# Altium PCB B45120517E(origin).PcbDoc (part 1 of 2)
Units mm, origin at the board's own origin, x right, y up, seen from the top; angles counter-clockwise.
Board outline 101.6 x 152.4 mm, 2 copper layers (Top Layer, Bottom Layer); 156 components, 88 nets, 425 pads, 670 vias.
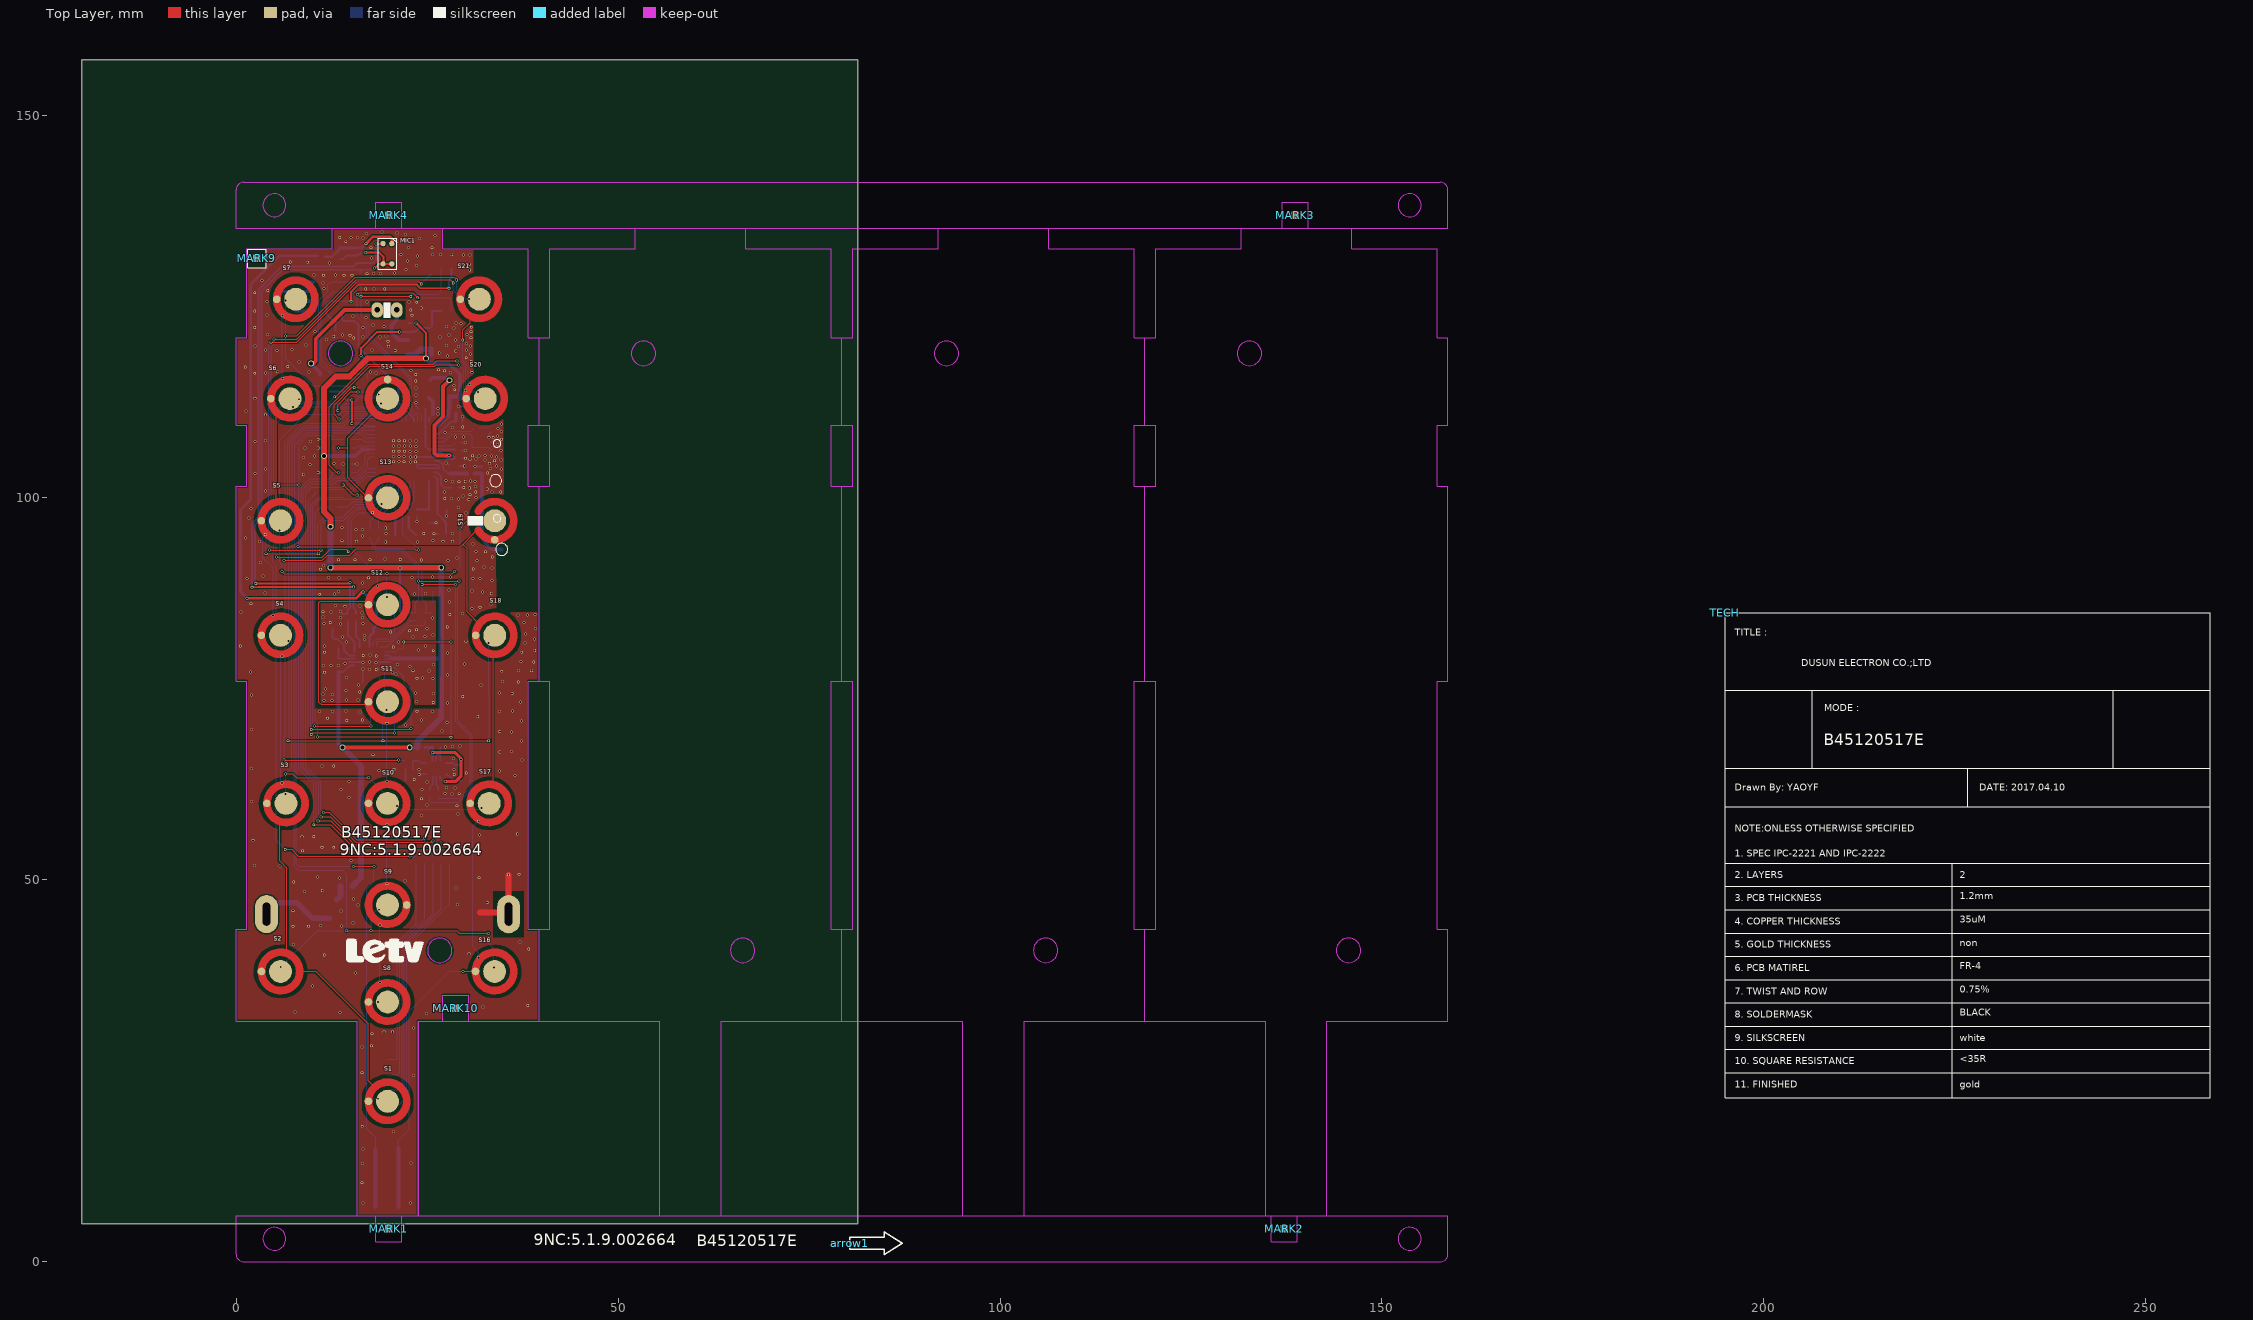
[diagram p0: Top Layer view]
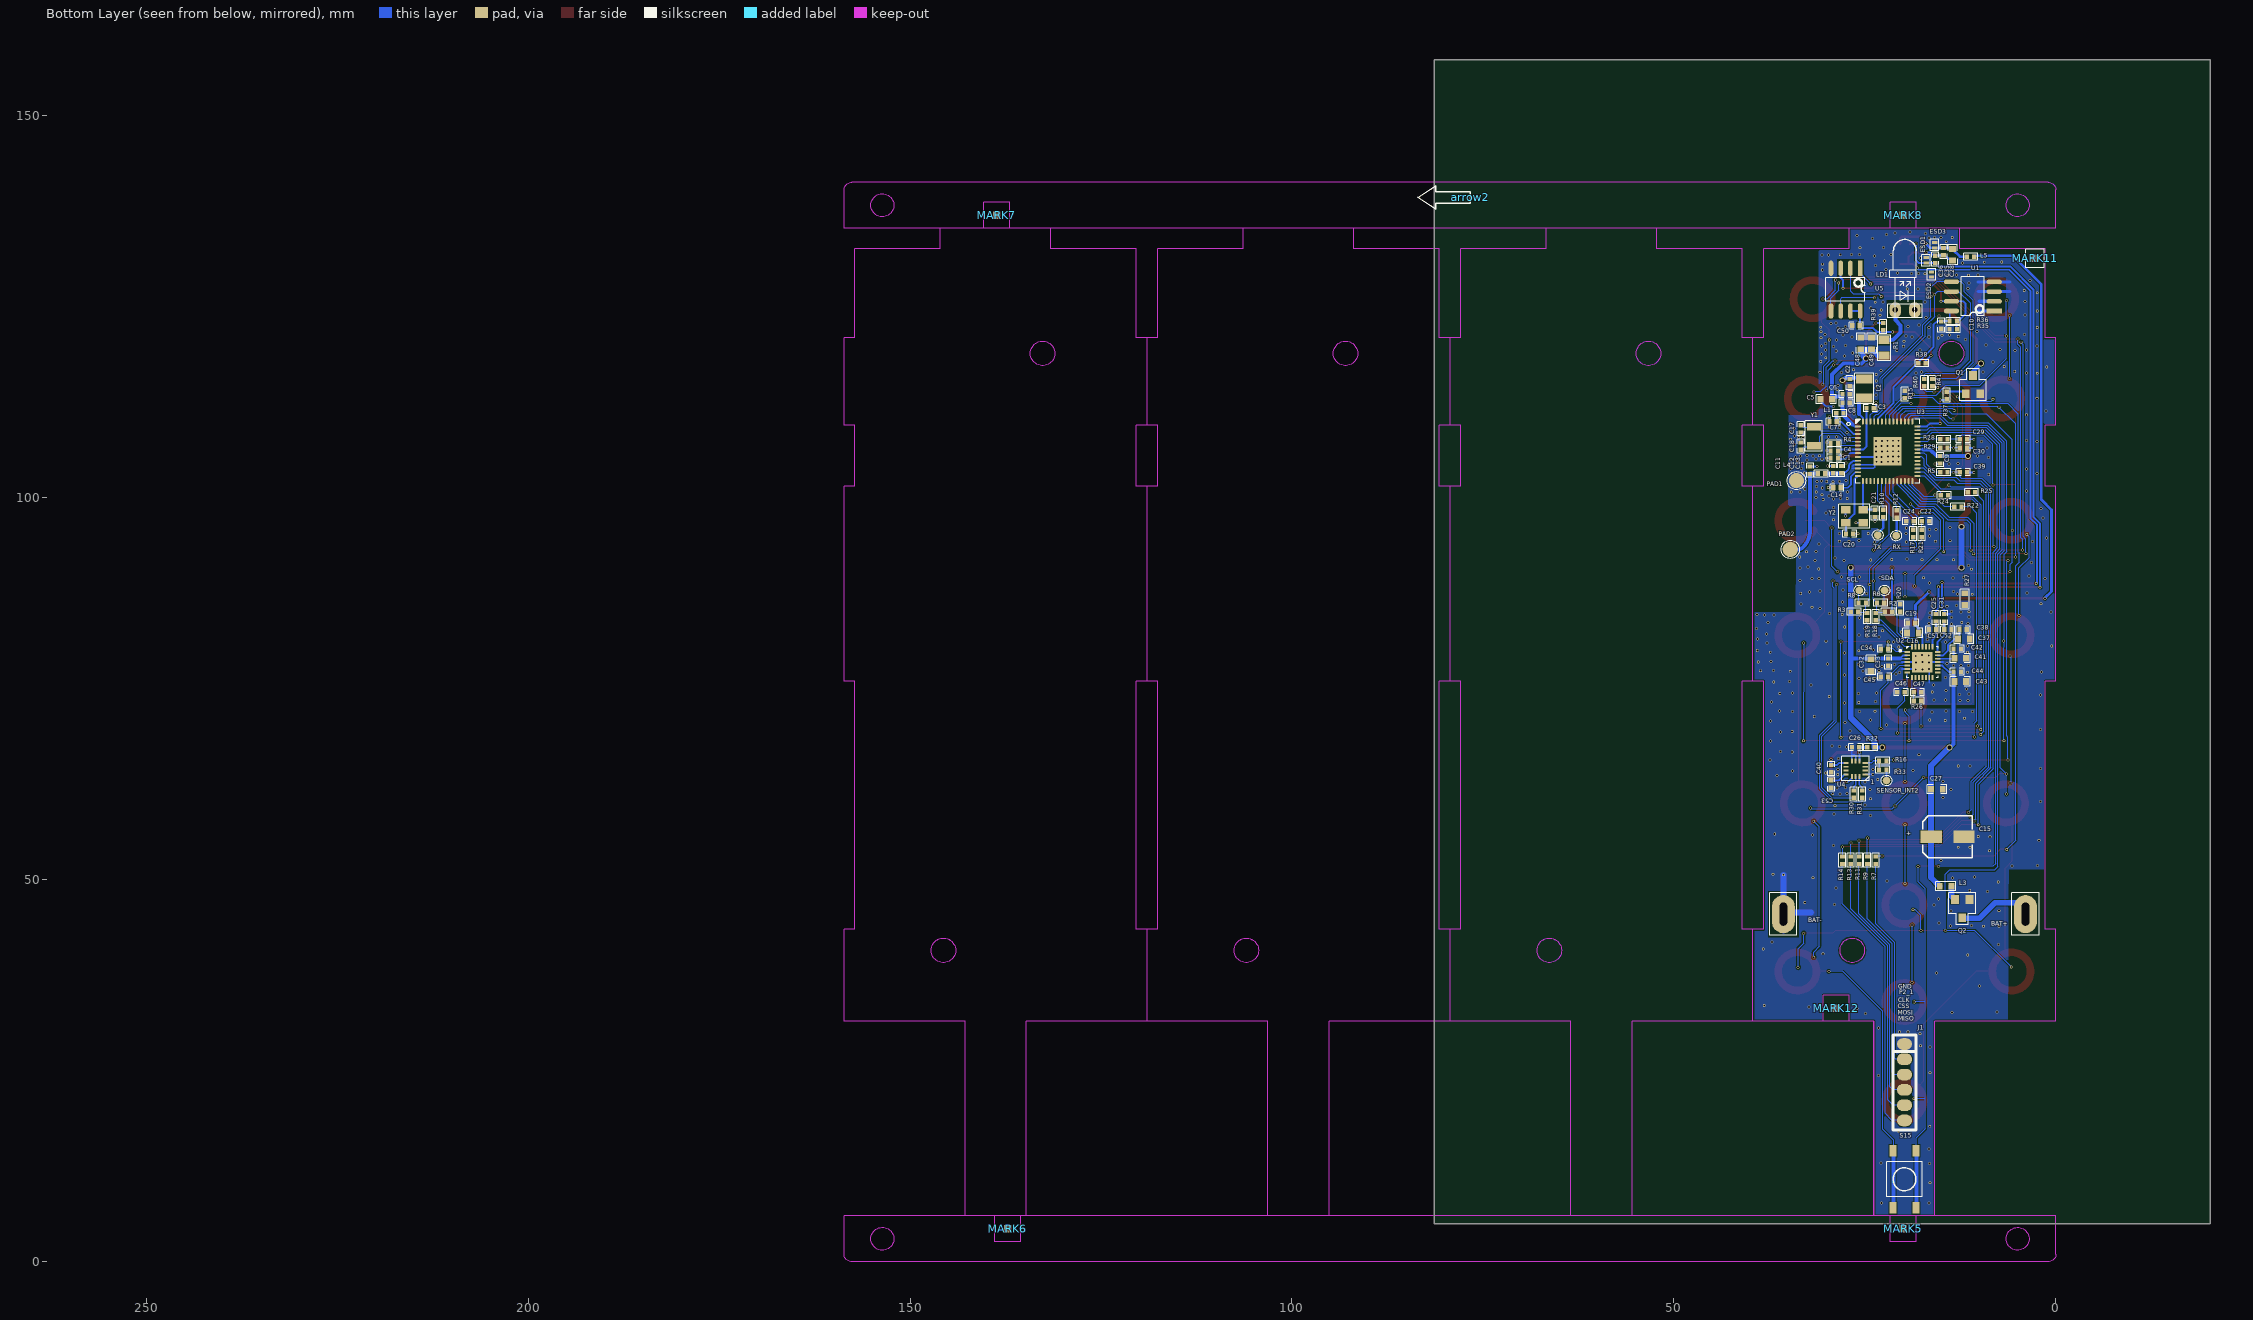
[diagram p1: Bottom Layer view, seen from below]

## Layer stack, top to bottom
Top Solder: solder mask 0.0102, Solder Resist, Dk 3.5
Top Layer: signal copper 0.0356
Dielectric1: core 0.32, FR-4, Dk 4.8
Bottom Layer: signal copper 0.0356
Bottom Solder: solder mask 0.0102, Solder Resist, Dk 3.5

## Board outline
81.4,4.94 81.4,157.34 -20.2,157.34 -20.2,4.94

## Design rules (kind name [scope] priority, off if disabled: settings)
Clearance [All] p1: gap=0.152 ignorepadtopadclearanceinfootprint=FALSE except(0: Arc-Hole Track-Hole SMDPad-Hole THPad-Hole Via-Hole Fill-Hole Poly-Hole Region-Hole Text-Hole)
ComponentClearance [All] p1: gap=0 collisioncheckmode=3 verticalgap=0 showdistances=FALSE
FabricationTestPointUsage TestPointUsage [All] p1: valid=0 allowmultiple=FALSE
FabricationTestpoint Testpoint [All] p1: side=3 testpointundercomponent=TRUE minsize=1.016 maxsize=2.54 preferedsize=1.524 minholesize=0 maxholesize=1.016 preferedholesize=0.813 testpointgrid=0.025 allowsidetop=TRUE allowsidebottom=TRUE usegrid=TRUE gridtolerance=0
PolygonConnect [All] p1: connectstyle=Direct reliefconductorwidth=0.254 reliefentries=4 polygonreliefangle="90 Angle" airgapwidth=0.254
RoutingVias [All] p1: holewidth=0.711 width=1.27 viastyle="Through Hole" minholewidth=0.711 minwidth=1.27 maxholewidth=0.711 maxwidth=1.27
SolderMaskExpansion [All] p1: expansion=0.102
Width [All] p1: maxlimit=2.54 minlimit=0.152 preferedwidth=0.254
27 further rules are at their usual default settings.

## Classes and differential pairs
component class DSR-0609-ES8218-0410: ANT1 BAT+ BAT- C0 C1 C2 C3 C4 C5 C6 C7 C8 C9 C10 C11 C12 C13 C14 C15 C16 C17 C18 C19 C20 C21 C22 C24 C25 C26 C27 C28 C29 C30 C31 C32 C33 C34 C35 C36 C37 C38 C39 C40 C41 C42 C43 C44 C45 C46 C47 C48 C49 C50 C51 C52 C53 ESD1 ESD2 ESD3 J1 L1 L2 L3 L4 L5 LD1 MIC1 PAD1 PAD2 Q1 Q2 R1 R2 R3 R4 R5 R6 R7 R8 R9 R10 R11 R12 R13 R14 R15 R16 R17 R18 R19 R20 R21 R22 R24 R25 R26 R27 R28 R29 R30 R31 R32 R33 R35 R36 R37 R38 R39 R40 R41 RX S1 S2 S3 S4 S5 S6 S7 S8 S9 S10 S11 S12 S13 S14 S15 S16 S17 S18 S19 S20 S21 SCL SDA SENSOR_INT2 TX U1 U2 U3 U4 U5 Y1 Y2

## Components (designator, comment, footprint, x,y, rotation, side; value= is the part's Value field where it differs from the comment)
arrow1 "Comment" 1-ARROW 80.345,2.413 r0 top
arrow2 "Comment" 1-ARROW 76.662,139.319 r0 bottom
BAT+ "TAP" BAT 3.979,45.5 r270 bottom locked
BAT- "TAP" BAT 35.679,45.5 r270 bottom locked
C1 "0.47uF" C-0402 29.012,105.232 r0 bottom
C2 "2.2uF" C-0402 26.98,115.087 r270 bottom
C3 "0.15uF" C-0402 24.313,111.709 r180 bottom
C4 "0.47uF" C-0402 29.012,106.172 r0 bottom
C5 "10uF" C-0603 30.053,112.903 r0 bottom
C6 "2.2uF" C-0402 27.462,113.538 r180 bottom
C7 "33pF/NC" C-0402 29.164,109.982 r0 bottom
C8 "47nF" C-0402 27.462,112.446 r180 bottom
C9 "47nF" C-0402 15.169,104.978 r270 bottom
C10 "1nF" C-0402 14.991,122.606 r270 bottom
C11 "NC" C-0402 32.187,103.607 r90 bottom
C12 "NC" C-0402 29.164,103.683 r90 bottom
C13 "0.5pf" C-0402 28.072,103.683 r90 bottom
C14 "0.47uF" C-0402 28.656,101.346 r0 bottom
C15 "贴片铝电解电容100uF/10V,∮5*5.3,立隆,85C,VE" CAP_ALUM-C 14.178,55.626 r180 bottom
C16 "10uF" C-0603 18.72,82.321 r0 bottom
C17 "22pF" C-0402 33.377,109.026 r270 bottom
C18 "22pF" C-0402 33.377,106.772 r90 bottom
C19 "0.1uF" C-0402 18.898,83.617 r0 bottom
C20 "15pF" C-0402 27.005,95.301 r180 bottom
C21 "8.2pF" C-0402 23.703,97.968 r270 bottom
C22 "100pF/NC" C-0402 17.069,96.926 r0 bottom
C24 "100pF/NC" C-0402 19.101,96.952 r180 bottom
C25 "1uF" C-0402 15.697,84.303 r270 bottom
C26 "0.1uF/50V/NC" C-0402 26.218,67.335 r0 bottom
C27 "0.1uF" C-0603 15.575,61.849 r180 bottom
C28 "10uF/NC" C-0603 13.538,131.826 r270 bottom
C29 "NC" C-0402 12.121,107.671 r180 bottom
C30 "NC" C-0402 12.121,106.528 r180 bottom
C31 "1uF" C-0402 14.605,84.303 r270 bottom
C32 "10uF" C-0603 24.211,78.105 r270 bottom
C33 "0.1uF" C-0402 21.925,78.486 r270 bottom
C34 "30pF" C-0402 22.428,80.213 r180 bottom
C35 "0.1uF" C-0402 14.707,132.232 r270 bottom
C36 "15pF" C-0402 15.799,131.216 r90 bottom
C37 "10uF" C-0603 12.04,81.509 r180 bottom
C38 "0.1uF" C-0402 12.141,82.753 r180 bottom
C39 "NC" c-0402 12.121,103.327 r180 bottom
C40 "0.1uF/50V/NC" C-0402 29.393,64.541 r270 bottom
C41 "10uF" C-0603 12.527,78.994 r180 bottom
C42 "0.1uF" C-0402 12.908,80.264 r180 bottom
C43 "10uF" C-0603 12.527,75.946 r180 bottom
C44 "0.1uF" C-0402 12.908,77.216 r180 bottom
C45 "30pF" C-0402 22.433,76.581 r0 bottom
C46 "30pF" C-0402 20.274,74.549 r0 bottom
C47 "30pF" C-0402 18.115,74.549 r180 bottom
C48 "10uF" C-0603 25.552,120.218 r90 bottom
C49 "1uF" C-0603 24.155,120.218 r90 bottom
C50 "1uF/NC" C-0402 26.162,122.555 r0 bottom
C51 "12pF/NC" C-0402 16.154,82.753 r180 bottom
C52 "12pF/NC" C-0402 14.148,82.753 r180 bottom
C53 "0.1uF/50V/NC" C-0402 29.439,62.535 r270 bottom
ESD1 "PESD5V0F1BL/NC" SOD882 16.993,131.089 r90 bottom
ESD2 "PESD5V0F1BL/NC" SOD882 16.281,129.235 r270 bottom
ESD3 "PESD5V0F1BL/NC" SOD882 15.875,133.071 r90 bottom
J1 "HEADER-6" PH-1*6-2.0 19.817,23.495 r270 bottom
L1 "MMZ1005Y152C" R-0402 28.275,111.074 r0 bottom
L2 "4.7uH" R-1008 25.1,114.325 r90 bottom
L3 "BLM18AG601SN1D" R-0603 14.432,49.149 r180 bottom
L4 "0R" R-0402 30.688,103.175 r180 bottom
L5 "BLM15HG102SN1D" R-0402 11.176,131.572 r0 bottom
LD1 "LR" IR-4.2-3 19.75,124.601 r180 bottom locked
MARK1 "MARK" MARK-3.0#1 20,4.301 r90 top (schematic designator MARK4)
MARK2 "MARK" MARK-3.0#1 137.232,4.295 r90 top (schematic designator MARK4)
MARK3 "MARK" MARK-3.0#1 138.632,136.999 r270 top (schematic designator MARK4)
MARK4 "MARK" MARK-3.0#1 20,136.999 r270 top
MARK5 "MARK" MARK-3.0#2 20,4.301 r180 bottom (schematic designator MARK4)
MARK6 "MARK" MARK-3.0#2 137.232,4.295 r0 bottom (schematic designator MARK4)
MARK7 "MARK" MARK-3.0#2 138.632,136.999 r0 bottom (schematic designator MARK4)
MARK8 "MARK" MARK-3.0#2 20,136.999 r180 bottom (schematic designator MARK4)
MARK9 "Comment" Mark-2.0-TOP 2.718,131.343 r180 top
MARK10 "MARK" MARK-3.0#1 28.759,33.2 r180 top (schematic designator MARK4)
MARK11 "Comment" Mark-2.0-TOP 2.718,131.343 r0 bottom
MARK12 "MARK" MARK-3.0#2 28.759,33.2 r90 bottom (schematic designator MARK4)
MIC1 "MSM42A3722H8" MSM42A3722H8 19.812,131.953 r0 top
PAD1 "TAP" TS-1.0#1 33.969,102.25 r180 bottom locked
PAD2 "TAP" TS-1.0#1 34.767,93.251 r180 bottom
Q1 "S8050LT1" SOT-23#1 10.851,114.808 r90 bottom
Q2 "DMP2305U" SOT-23#2 12.273,46.228 r270 bottom
R1 "2R" R-0805 22.479,119.634 r270 bottom
R2 "1.5K" R-0402 21.925,85.09 r0 bottom
R3 "1.5K" R-0402 26.37,85.09 r180 bottom
R4 "0R" R-0402 29.012,107.112 r180 bottom
R5 "100R" R-0402 14.661,103.327 r180 bottom
R6 "33R" R-0402 22.941,86.233 r0 bottom
R7 "33R" R-0402 23.576,52.553 r90 bottom
R8 "33R" R-0402 25.354,86.233 r180 bottom
R9 "33R" R-0402 24.668,52.553 r90 bottom
R10 "33R" R-0402 22.611,97.968 r270 bottom
R11 "33R" R-0402 25.76,52.553 r90 bottom
R12 "33R" R-0402 20.833,97.892 r270 bottom
R13 "33R" R-0402 26.853,52.553 r90 bottom
R14 "33R" R-0402 27.945,52.553 r90 bottom
R15 "47K" R-0402 19.766,113.538 r90 bottom
R16 "0R/NC" R-0402 22.662,65.557 r0 bottom
R17 "33R" R-0402 18.669,95.326 r90 bottom
R18 "100R" R-0402 23.576,84.455 r90 bottom
R19 "100R" R-0402 24.719,84.455 r90 bottom
R20 "10k" R-0402 20.371,85.573 r90 bottom
R21 "33R" R-0402 17.577,95.326 r90 bottom
R22 "33R" R-0402 12.827,98.806 r0 bottom
R24 "33R" R-0402 14.605,100.33 r0 bottom
R25 "33R" R-0402 11.049,100.711 r0 bottom
R26 "33R" R-0402 18.115,73.406 r180 bottom
R27 "0R" R-0603 11.938,86.741 r90 bottom
R28 "100R" R-0402 14.661,107.671 r180 bottom
R29 "100R" R-0402 14.661,106.528 r180 bottom
R30 "33R/NC" R-0402 26.446,61.214 r270 bottom
R31 "33R/NC" R-0402 25.354,61.214 r270 bottom
R32 "0R/NC" R-0402 24.211,67.335 r180 bottom
R33 "33R/NC" R-0402 22.662,64.414 r0 bottom
R35 "0R/NC" R-0402 13.441,122.047 r180 bottom
R36 "0R" R-0402 13.441,123.139 r180 bottom
R37 "1K" R-0402 14.305,113.411 r270 bottom
R38 "0R/NC" R-0402 17.526,117.602 r180 bottom
R39 "NC" R-0402 22.581,122.403 r90 bottom
R40 "0R/NC" R-0402 17.247,115.087 r90 bottom
R41 "0R/NC" R-0402 16.154,115.087 r90 bottom
RX "TAP" TS-1.0#2 20.909,95.047 r0 bottom
S1 "SW-PB" "K MAT D5"#1 19.832,21 r0 top locked
S2 "SW-PB" "K MAT D5"#1 5.817,38 r0 top locked
S3 "SW-PB" "K MAT D5"#1 6.529,60 r0 top locked
S4 "SW-PB" "K MAT D5"#1 5.802,82 r0 top locked
S5 "SW-PB" "K MAT D5"#2 5.802,97 r0 top locked
S6 "SW-PB" "K MAT D5"#1 7.043,112.987 r0 top locked
S7 "SW-PB" "K MAT D5"#1 7.817,126 r0 top locked
S8 "SW-PB" "K MAT D5"#1 19.829,34 r0 top locked
S9 "SW-PB" "K MAT D5"#1 19.829,46.7 r180 top locked
S10 "SW-PB" "K MAT D5"#1 19.829,60 r0 top locked
S11 "SW-PB" "K MAT D5"#1 19.829,73.3 r0 top locked
S12 "SW-PB" "K MAT D5"#1 19.829,86 r0 top locked
S13 "SW-PB" "K MAT D5"#1 19.832,100 r0 top locked
S14 "SW-PB" "K MAT D5"#1 19.829,112.987 r270 top
S15 "SW-PB" KG4.5*4.5-SMD-1 19.817,10.795 r90 bottom
S16 "SW-PB" "K MAT D5"#1 33.841,38 r0 top locked
S17 "SW-PB" "K MAT D5"#1 33.129,60 r0 top locked
S18 "SW-PB" "K MAT D5"#1 33.856,82 r0 top locked
S19 "SW-PB" "K MAT D5"#1 33.856,97 r90 top
S20 "SW-PB" "K MAT D5"#1 32.614,112.987 r0 top locked
S21 "SW-PB" "K MAT D5"#1 31.841,126 r0 top locked
SCL "TAP" TS-1.0#2 25.735,87.884 r270 bottom
SDA "TAP" TS-1.0#2 22.433,87.884 r270 bottom
SENSOR_INT2 "13" TS-1.0#2 22.179,62.992 r180 bottom
TECH "Comment" "PCB technical" 194.924,84.938 r0 top
TX "TAP" TS-1.0#2 23.322,95.123 r0 bottom
U1 "FM24C1024A" SOP08-6.0-1.27 10.876,126.365 r90 bottom
U2 "ES8218" QFN-28-4*4-1 17.48,78.486 r270 bottom
U3 "CSR1011" QFN-56-8*8 22.026,106.071 r270 bottom
U4 "BMI160/NC" LGA-14 26.218,64.541 r0 bottom
U5 "AT25F1024B/NC" SOP08-6.0-1.27 27.534,127.254 r0 bottom
Y1 "32.768KHz,12.5pF" 32.768Khz-3215 31.679,108.077 r270 bottom
Y2 "16MHz,9pF" XD3225-1-12M-125M 26.37,97.587 r180 bottom

## Footprints (in the part's own frame and the unit in brackets; to place one, negate y for a bottom-side part, rotate by r counter-clockwise, add the part's x,y. Pads: shape width x height; smd on the part's side, far side on the other; paste and mask are expansions set on the pad)
1-ARROW [mm]
  silkscreen extent 0,-1.52 6.86,1.52
32.768Khz-3215 [mm]
  rect 1x1.8 smd: 1(-1.25,0) 2(1.25,0)
  silkscreen extent -2,-1.1 2,1.1
BAT [mm]
  oval 5x3 hole 1 slot 3 at 0 deg: 1(0,0)
  silkscreen extent -2.79,-1.78 2.79,1.78
C-0402 [mil]
  rect 22x24 smd: 1(-19,0) 2(19,0)
  silkscreen extent -36,-18 36,18
c-0402 [mil]
  rect 22x24 smd: 1(-19,0) 2(19,0)
  silkscreen extent -36,-18 36,18
C-0603 [mil]
  rect 30x35 smd: 1(-30,0) 2(30,0)
  silkscreen extent -51,-24 51,24
CAP_ALUM-C [mm]
  rect 2.8x1.6 smd: 1(-2.15,0) 2(2.15,0)
  silkscreen extent -3.25,-2.75 3.25,2.75
IR-4.2-3 [mm]
  oval 1.524x2 hole 0.7: 1(-1.27,0) 2(1.27,0)
  silkscreen extent -2.27,-1.04 2.29,9.22
"K MAT D5"#1 [mm]
  round 3 smd: 1(0,0)
  round 1 smd: 2(-2.5,0)
  Top Layer circle w1: c0,0 r2.5
"K MAT D5"#2 [mm]
  round 3 smd: 1(0,0)
  round 1 smd: 2(-2.5,0)
  Top Layer lines w1: -0.539,2.441 ccw(c0,0) 2.5,0 ccw(c0,0) -0.539,2.441
KG4.5*4.5-SMD-1 [mm]
  rect 1.5x0.9 smd: 1(-3.75,-1.5) 1(3.75,-1.5) 2(-3.75,1.5) 2(3.75,1.5)
  silkscreen extent -2.3,-2.3 2.3,2.3
LGA-14 [mm]
  rect 0.675x0.25 smd: 1(-1.263,0.75) 2(-1.263,0.25) 3(-1.263,-0.25) 4(-1.263,-0.75) 8(1.263,-0.75) 9(1.263,-0.25) 10(1.263,0.25) 11(1.263,0.75)
  rect 0.25x0.675 smd: 5(-0.5,-1.013) 6(0,-1.013) 7(0.5,-1.013) 12(0.5,1.013) 13(0,1.013) 14(-0.5,1.013)
  silkscreen extent -1.8,-1.6 1.8,1.6
Mark-2.0-TOP [mm]
  rect 1x1 smd mask+0.5: 1(0,0)
  Top Layer pour cut-out: -1.2,1.2 -1.2,-1.2 1.2,-1.2 1.2,1.2
  Top Overlay keep-out lines w0.127: 1.2,1.2 1.2,-1.2 -1.2,-1.2 -1.2,1.2 1.2,1.2
  silkscreen extent -1.2,-1.2 1.2,1.2
MARK-3.0#1 [mm]
  rect 1x1 smd: 1(0,0)
  rect 2.5x2.5 on Top Solder: 4(0,0)
  Keep-Out Layer lines w0.127: -1.7,1.7 -1.7,-1.7 1.7,-1.7 1.7,1.7 -1.7,1.7
MARK-3.0#2 [mm]
  rect 1x1 smd: 1(0,0)
  rect 2.5x2.5 on Bottom Solder: 4(0,0)
  Keep-Out Layer lines w0.127: 1.7,-1.7 -1.7,-1.7 -1.7,1.7 1.7,1.7 1.7,-1.7
MSM42A3722H8 [mm]
  round 0.7 smd: 1(0.575,1.33) 2(0.575,-1.33) 3(-0.575,-1.33) 4(-0.575,1.33)
  silkscreen extent -1.2,-2 1.2,2
"PCB technical" [mm]
  silkscreen extent 0,-63.5 63.5,0
PH-1*6-2.0 [mm]
  oval 1.524x2 smd: 1(-5,0) 2(-3,0) 3(-1,0) 4(1,0) 5(3,0) 6(5,0)
  silkscreen extent -6.21,-1.5 6.26,1.5
QFN-28-4*4-1 [mm]
  rect 0.25x0.7 smd: 1(-1.35,-2) 2(-0.9,-2) 3(-0.45,-2) 4(0,-2) 5(0.45,-2) 6(0.9,-2) 7(1.35,-2) 15(1.35,2) 16(0.9,2) 17(0.45,2) 18(0,2) 19(-0.45,2) 20(-0.9,2) 21(-1.35,2)
  rect 0.7x0.25 smd: 8(2,-1.35) 9(2,-0.9) 10(2,-0.45) 11(2,0) 12(2,0.45) 13(2,0.9) 14(2,1.35) 22(-2,1.35) 23(-2,0.9) 24(-2,0.45) 25(-2,0) 26(-2,-0.45) 27(-2,-0.9) 28(-2,-1.35)
  rect 2.7x2.7 smd: 29(0,0)
  silkscreen extent -2.05,-3.03 2.05,2.05
QFN-56-8*8 [mm]
  rect 0.4x0.15 on Bottom Overlay: 0(-4.597,-2.743) 0(-4.597,-0.254) 0(-4.597,2.26) 0(4.598,-3.251) 0(4.598,-0.737) 0(4.598,1.752)
  rect 0.15x0.4 on Bottom Overlay: 0(-2.285,4.623) 0(-1.269,-4.623) 0(0.229,4.623) 0(1.22,-4.623) 0(2.719,4.623)
  rect 3.67x3.67 smd: 0(-0.025,0)
  oval 0.25x0.8 smd: 1(-3.275,-3.9) 2(-2.775,-3.9) 3(-2.275,-3.9) 4(-1.775,-3.9) 5(-1.275,-3.9) 6(-0.775,-3.9) 7(-0.275,-3.9) 8(0.225,-3.9) 9(0.725,-3.9) 10(1.22,-3.886) 11(1.725,-3.9) 12(2.225,-3.9) 13(2.725,-3.9) 14(3.225,-3.9) 29(3.225,3.9) 30(2.725,3.9) 31(2.225,3.9) 32(1.725,3.9) 33(1.225,3.9) 34(0.725,3.9) 35(0.225,3.9) 36(-0.275,3.9) 37(-0.775,3.9) 38(-1.275,3.9) 39(-1.775,3.9) 40(-2.275,3.9) 41(-2.775,3.9) 42(-3.275,3.9)
  oval 0.8x0.25 smd: 15(3.875,-3.25) 16(3.875,-2.75) 17(3.875,-2.25) 18(3.875,-1.75) 19(3.875,-1.25) 20(3.875,-0.75) 21(3.875,-0.25) 22(3.875,0.25) 23(3.875,0.75) 24(3.875,1.25) 25(3.875,1.75) 26(3.875,2.25) 27(3.875,2.75) 28(3.875,3.25) 43(-3.925,3.25) 44(-3.925,2.75) 45(-3.925,2.25) 46(-3.925,1.75) 47(-3.925,1.25) 48(-3.925,0.75) 49(-3.925,0.25) 50(-3.925,-0.25) 51(-3.925,-0.75) 52(-3.925,-1.25) 53(-3.925,-1.75) 54(-3.925,-2.25) 55(-3.925,-2.75) 56(-3.925,-3.25)
  silkscreen extent -4.3,-5.34 4.19,4.19
R-0402 [mil]
  rect 22x24 smd: 1(-19,0) 2(19,0)
  silkscreen extent -36,-18 36,18
R-0603 [mil]
  rect 30x35 smd: 1(-30,0) 2(30,0)
  silkscreen extent -51,-24 51,24
R-0805 [mil]
  rect 40x56 smd: 1(-40,0) 2(40,0)
  silkscreen extent -66,-34 66,34
R-1008 [mm]
  rect 1.2x2.2 smd: 1(-1.25,0) 2(1.25,0)
  silkscreen extent -2.01,-1.24 2,1.24
SOD882 [mm]
  rect 0.4x0.7 smd: 1(-0.35,0) 2(0.35,0)
  silkscreen extent -0.75,-0.55 0.75,0.55
SOP08-6.0-1.27 [mm]
  rect 0.6x2 smd: 1(-1.905,-2.8)
  oval 0.6x2 smd: 2(-0.635,-2.8) 3(0.635,-2.8) 4(1.905,-2.8) 5(1.905,2.8) 6(0.635,2.8) 7(-0.635,2.8) 8(-1.905,2.8)
  silkscreen extent -2.54,-1.53 2.57,1.52
SOT-23#1 [mil]
  rect 45x40 smd: 1(-47.24,37.4) 2(-47.24,-37.4) 3(47.24,0)
  silkscreen extent -83,-69 83,69
SOT-23#2 [mil]
  rect 45x40 smd: 1(-47.24,-37.4) 2(-47.24,37.4) 3(47.24,0)
  silkscreen extent -83,-69 83,69
TS-1.0#1 [mm]
  round 2 smd: 1(0,0)
  silkscreen extent -1.2,-1.2 1.2,1.2
TS-1.0#2 [mm]
  round 1 smd: 1(0,0)
  silkscreen extent -0.7,-0.7 0.7,0.7
XD3225-1-12M-125M [mm]
  rect 1.2x1 smd: 1(-1.15,-0.85) 2(1.15,0.85) 3(-1.15,0.85) 3(1.15,-0.85)
  silkscreen extent -2.04,-1.6 2.02,1.6

## Part data
C1 C2 C3 C4 C5 C6 C7 C8 C9 C10 C11 C12 C13 C14 C16 C17 C18 C19 C20 C21 C25 C28 C29 C30 C31 C32 C33 C34 C35 C36 C37 C38 C39 C41 C42 C43 C44 C45 C46 C47 C48 C49 C50 C51 C52: library part CAP, "Capacitor"
C15 C27: library part C_Dup1
C22 C24: library part CAP
C26 C40 C53: library part Cap, "capacitor 27 pF NPO , +/- 2 %, SMD case 0603"
ESD1 ESD2 ESD3: library part ESD
J1: library part HEADER-5
L1 L5: library part "INDUCTOR IRON"
L2 L4: library part INDUCTOR
L3: library part Inductance
LD1: library part LED
Q1: library part NPN, "NPN型晶体管"
Q2: library part "MOSFET P"
R1 R2 R3 R4 R5 R6 R7 R8 R9 R10 R11 R12 R13 R14 R15 R16 R18 R19 R20 R22 R24 R25 R26 R27 R28 R29 R30 R31 R32 R33: library part RES1
R17 R21 R35 R36 R37 R38 R39 R40 R41: library part RES
SENSOR_INT2: library part TESTPOINT
U1: library part AT24C512
U3: library part CSR1001
U4: library part BMI160
U5: library part AT25F512B
Y1: library part CRYSTAL
Y2: library part CRYSTAL4

## Free pads (board coordinates)
  round 1.5 on Bottom Solder: 0(34.061,99.873)

## Via types
v1: diameter 0.381, hole 0.254, Top Layer to Bottom Layer, tented both sides, 661 vias
v2: diameter 0.762, hole 0.508, Top Layer to Bottom Layer, tented both sides, 9 vias

## Nets (pads, with @x,y where several pads share a name; then routed paths per layer and width w, separated by ;. In a path a pad name is that pad's centre, name@x,y a point inside that pad or via, vN(x,y) a via of type N, cw(c..) or ccw(c..) an arc to the next point about the centre after c; other vN are vias at no path point)
9867_BCLK: R24.2 U3.29 | length 4.4
  Bottom Layer w0.152: R24.2@15.062,100.355 15.062,100.711 17.197,102.846 U3.29@18.254,102.846
9867_LRCLK: R25.2 U3.30 | length 7.8
  Bottom Layer w0.152: R25.2@11.532,100.711 11.913,101.092 14.992,101.092 17.246,103.346 U3.30@18.254,103.346
9867_MCLK: R22.2 U3.26 | length 8.2
  Bottom Layer w0.152: R22.2@13.31,98.806 14.58,98.806 15.24,99.466 17.531,99.466 19.777,101.712 U3.26@19.777,102.196
9867_SCL: R3.2 R8.2 R17.1 R19.2 R30.2 | length 52
  Top Layer w0.152: v1(24.363,88.671) v1(28.732,88.671)
  Bottom Layer w0.152: R17.1@18.669,94.844 18.669,94.488 18.212,94.031 18.212,93.675 18.461,93.426 21.691,93.426 24.363,90.754 24.363,86.741 R8.2@24.871,86.233 R19.2@24.871,85.09 ; R19.2@24.719,84.938 R3.2@25.633,84.938 ; R30.2@26.446,60.681 29.266,60.681 30.637,62.052 30.637,68.809 28.732,70.714 v1(28.732,88.671)
9867_SDA: R2.2 R6.2 R18.2 R21.1 R31.2 | length 55.8
  Top Layer w0.152: v1(23.881,89.103) v1@29.215,89.103
  Bottom Layer w0.152: R21.1@17.577,94.844 17.577,94.412 17.882,94.107 17.882,93.523 18.288,93.116 21.568,93.116 23.881,90.804 23.881,86.69 R6.2@23.424,86.233 23.424,85.09 R18.2@23.576,84.938 R2.2@22.662,84.938 ; R31.2@25.354,60.731 25.354,60.249 25.456,60.147 29.164,60.147 30.942,61.925 30.942,68.935 29.043,70.834 29.043,88.195 29.189,88.341 v1(29.189,89.103)
9867_SDOUT: R26.2 U3.27 | length 50.4
  Top Layer w0.152: v1(10.241,70.129) v1(17.632,70.129)
  Bottom Layer w0.152: v1(10.241,70.129) 10.051,70.32 10.051,98.915 10.918,99.783 17.34,99.783 19.277,101.719 U3.27@19.277,102.196 ; v1(17.632,70.129) R26.2@17.632,73.406
AGND: C16.2 C19.2 C28.2 C31.1 C32.2 C33.2 C34.1 C35.2 C36.2 C37.2 C38.2 C41.2 C42.2 C43.2 C44.2 C45.2 C46.2 C47.2 C51.1 C52.2 ESD2.1 MIC1.2 MIC1.3 R20.2 R27.1 U2.4 U2.6 U2.13 U2.18 U2.29 | length 88.3
  Top Layer w0.254: v1@2.602,88.767 14.751,88.767 v1(14.91,88.925) ; v1(16.916,132.105) 18.745,132.105 19.279,131.572 MIC1.3@19.279,130.623 ; v1(18.136,130.059) 18.172,130.059 18.736,130.623 MIC1.2@20.387,130.623
  Bottom Layer w0.254: v1(2.57,88.798) 2.469,88.9 2.469,96.453 3.345,97.33 3.345,127.094 6.107,129.856 17.932,129.856 v1(18.136,130.059) ; C28.2@13.64,131.267 14.046,131.267 14.529,131.75 15.748,131.75 15.85,131.851 16.154,131.851 16.408,132.105 v1(16.916,132.105) ; 13.843,84.811 13.868,84.785 C31.1@14.605,84.785 14.605,85.319 14.91,85.623 v1(14.91,88.925) ; 14.788,78.486 U2.29@16.337,78.486 ; ESD2.1@16.307,129.534 16.307,129.856 ; 16.58,75.794 U2.29@16.58,77.343 ; U2.29@18.623,77.586 20.172,77.586 ; U2.29@18.623,78.486 20.172,78.486
  other v1: 25.806,73.203 23.627,73.355 11.511,73.482 12.578,73.482 14.432,73.508 15.931,73.508 12.603,74.27 11.359,74.32 25.862,74.397 23.5,74.473 16.185,74.574 14.407,74.803 11.689,74.981 16.007,75.489 25.786,76.327 23.703,76.378 24.389,76.403 14.432,76.479 20.934,76.911 20.452,77.114 11.587,77.165 25.227,77.318 23.144,77.368 17.48,77.546 18.344,77.546 16.591,77.572 22.789,77.927 11.46,78.029 12.446,78.029 13.386,78.054 21.138,78.207 25.837,78.207 14.249,78.334 16.616,78.435 18.318,78.461 17.48,78.486 18.344,79.299 16.642,79.375 17.505,79.426 11.562,79.781 25.811,79.985 23.851,80.086 20.574,80.493 11.587,80.62 24.79,80.62 21.234,81.102 14.453,81.128 16.789,81.432 13.945,81.763 23.139,81.788 24.714,81.839 16.789,81.991 25.786,82.042 20.244,82.423 22.682,82.601 23.601,82.728 24.973,82.906 13.665,83.49 11.532,83.566 16.637,83.566 12.324,83.668 25.73,84.252 16.535,84.328 13.665,84.353 11.354,84.404 16.459,84.912 12.395,85.039 11.359,85.09 13.691,85.141 14.275,85.801 16.231,85.852 13.03,85.903
C0: R28.1 U3.38 | length 3.1
  Bottom Layer w0.152: R28.1@15.143,107.671 16.489,107.671 16.814,107.346 U3.38@18.127,107.346
C1: R29.1 U3.37 | length 3.1
  Bottom Layer w0.152: R29.1@15.143,106.528 15.804,106.528 16.122,106.846 U3.37@18.127,106.846
C2: R5.1 U3.35 | length 4.7
  Bottom Layer w0.152: R5.1@15.143,103.327 15.88,103.327 16.921,104.369 16.921,105.562 17.205,105.846 U3.35@18.127,105.846
GND: BAT-.1 C1.2 C2.2 C3.2 C4.2 C5.2 C6.2 C7.2 C8.2 C9.2 C10.2 C11.2 C12.2 C13.2 C14.2 C15.2 C17.2 C18.2 C20.2 C21.2 C22.1 C24.1 C26.2 C27.2 C29.2 C30.2 C39.2 C40.2 C48.2 C49.2 C50.2 C53.2 ESD1.2 ESD2.2 ESD3.2 J1.1 PAD1.1 Q1.2 Q2.2 R4.1 R15.2 R27.2 R35.1 U1.1 U1.2 U1.3 U1.4 U3.0@22.027,106.096 U3.9 U3.11 U3.12 U4.1 U4.6 U4.7 U5.4 Y2.3 | length 64.4
  Top Layer w0.762: 31.897,45.73 BAT-.1@35.552,45.73 ; BAT-.1@35.679,43.345 v1(35.679,50.655)
  Bottom Layer w0.2: U4.6@26.218,65.554 26.218,66.243 26.37,66.396 26.718,66.396 ; U4.7@26.718,65.554 C26.2@26.718,67.318
  Bottom Layer w0.203: v1(23.5,104.725) 23.878,104.346 26.393,104.346 26.573,104.165 ; U3.0@23.716,104.508 23.716,104 23.87,103.846 26.635,103.846 26.649,103.861 ; v1(23.97,63.791) U4.1@24.955,63.791
  Bottom Layer w0.254: v1(10.749,103.327) C39.2@11.638,103.327 ; v1(10.749,106.528) C30.2@11.638,106.528 ; v1(10.749,107.671) C29.2@11.638,107.671 ; C9.2@15.245,104.419 v1(15.829,104.419) ; U3.0@22.789,105.346 U3.9@25.927,105.346 ; v1(23.551,112.471) 23.551,111.989 C3.2@23.83,111.709 ; v1(23.703,96.876) C21.2@23.703,97.485 ; Y2.3@25.22,96.737 v1(26.179,96.737) ; v1(25.883,95.301) C20.2@26.522,95.301 ; v1(27.483,104.572) 27.559,104.572 C13.2@27.864,104.267 ; v1(27.52,97.631) Y2.3@27.52,98.437 ; C14.2@29.139,101.346 v1(29.799,101.346) ; v1(29.139,111.938) 30.05,111.938 C5.2@30.815,112.703 ; C12.2@29.164,104.165 v1(29.87,104.165) ; R4.1@29.52,107.239 v1(30.028,107.239) ; C1.2@29.545,105.181 v1(30.028,105.181) ; C4.2@29.545,106.197 v1(30.028,106.197) ; C7.2@29.647,109.982 v1(29.647,110.668) ; v1(31.293,104.089) C11.2@32.187,104.089 ; v1(33.126,107.925) 33.126,108.356 33.339,108.569 C17.2@33.377,108.569 ; C18.2@33.377,107.229 33.377,107.236 33.66,107.518 v1(33.66,107.925)
  Bottom Layer w0.406: 6,127 10.164,127 ; 5.999,128.27 10.216,128.27 ; U1.1@7.828,124.46 10.292,124.46 ; U1.2@8.076,125.73 10.064,125.73
  Bottom Layer w0.762: 32.075,45.705 BAT-.1@35.73,45.705 ; BAT-.1@35.679,43.345 v1(35.679,50.655)
  other v1: 16.591,7.671 22.839,7.671 16.464,10.338 16.566,12.878 22.916,12.929 16.616,14.732 20.63,17.043 16.515,17.729 23.22,24.359 16.489,24.74 16.489,28.118 17.734,28.27 17.785,29.845 19.36,30.099 20.477,30.099 23.22,30.607 24.922,32.487 13.594,32.639 7.701,32.664 26.04,33.172 32.314,33.35 38.181,33.553 10.012,36.068 15.651,37.795 11.536,40.157 30.485,40.31 38.308,40.919 7.523,41.529 37.16,41.859 7.472,43.917 9.479,43.917 13.797,43.967 11.028,44.018 15.321,44.323 13.746,45.898 7.447,45.949 15.981,46.711 28.986,46.787 32.872,47 15.372,47.473 8.946,48.489 11.282,48.616 28.783,48.92 7.549,49.682 22.103,49.835 13.518,50.241 31.806,50.267 10.673,50.343 37.013,50.724 5.771,51.791 2.418,51.841 15.067,52.527 8.692,53.797 11.257,54.254 12.781,54.254 29.088,54.483 2.189,55.169 8.615,55.626 10.165,55.651 31.856,55.88 36.809,55.982 24.287,58.42 29.037,58.623 28.935,59.69 24.998,59.766 2.011,60.249 24.287,60.604 14.788,60.757 28.245,61.214 29.21,61.265 27.361,61.316 13.721,61.798 24.313,61.798 28.677,62.001 27.534,62.052 24.973,62.814 14.762,62.865 23.322,63.144 36.505,63.652 28.554,63.754 30.129,63.957 34.493,64.262 18.725,64.287 23.957,64.414 28.529,64.414 20.68,64.465 2.011,64.592 11.257,64.872 12.781,64.897 37.414,65.659 28.453,65.888 17.937,66.37 34.519,66.751 36.068,66.802 27.411,67.386 28.326,67.437 29.316,67.513 37.363,68.174 36.068,69.342 34.519,69.393 26.98,69.469 2.037,69.647 22.154,70.282 27.589,70.587 37.363,70.79 14.483,70.866 16.515,70.891 24.287,70.917 11.943,71.145 31.628,71.349 16.21,71.958 12.629,72.009 10.901,72.034 25.735,72.034 34.493,72.034 23.678,72.06 14.381,72.111 36.17,72.111 27.691,73.127 37.211,73.279 29.672,73.99 2.011,74.168 36.144,74.397 34.468,74.473 32.034,75.489 36.936,75.895 34.874,75.946 27.691,76.784 1.91,77.191 34.777,77.292 38.664,77.368 36.957,77.419 29.875,78.257 38.964,78.511 37.317,78.588 27.686,79.705 37.389,79.781 39.091,80.01 0.538,80.62 37.821,80.975 30.104,81.229 39.04,81.509 37.871,82.194 39.197,82.88 27.64,83.083 37.668,83.693 36.881,84.658 38.151,84.684 39.141,84.709 27.97,84.734 29.647,84.836 0.665,85.039 30.886,85.522 31.907,85.674 33.38,86.106 1.961,86.131 27.919,86.36 10.952,87.376 23.347,87.401 12.903,87.427 24.795,87.452 33.406,87.452 3.764,87.554 32.237,87.655 13.416,87.732 30.891,87.808 27.894,87.909 16.54,88.849 33.482,89.179 31.018,89.433 31.933,89.433 1.427,89.459 13.492,89.51 17.353,89.535 23.043,89.56 12.07,89.586 25.71,89.611 28.046,89.611 3.51,89.764 11.054,90.653 31.044,90.703 33.482,90.83 32.466,90.957 11.43,91.161 3.205,91.542 31.526,91.77 27.716,91.796 24.236,91.846 13.416,91.897 15.57,91.897 17.526,91.897 21.488,91.948 19.507,91.999 28.91,92.1 33.533,92.253 32.669,92.939 31.399,92.964 30.993,93.929 23.754,94.209 19.583,94.234 3.078,94.259 15.748,94.31 27.107,94.31 28.351,94.31 13.868,94.386 25.786,94.412 1.219,94.767 16.535,94.996 19.634,95.352 24.567,95.352 28.326,95.352 16.535,95.834 15.697,95.86 19.583,96.063 13.868,96.114 29.113,97.13 1.681,97.333 30.078,97.993 1.956,98.603 29.139,98.755 30.459,99.771 29.139,99.873 28.173,99.898 27.31,99.924 31.399,100.051 29.697,100.254 30.632,100.406 27.284,100.762 31.369,100.762 34.646,100.762 33.482,100.787 3.835,100.914 32.872,101.168 30.582,101.295 31.344,101.498 29.189,102.108 28.326,102.133 30.002,102.159 31.298,102.159 30.663,102.184 27.462,102.26 8.793,103.073 2.464,103.175 32.944,103.226 3.835,103.759 34.722,103.759 33.299,103.861 34.087,104.165 9.677,104.343 14,104.445 12.806,104.496 33.147,104.521 22.839,104.699 20.604,104.725 22.001,104.725 21.341,104.75 33.807,104.851 34.696,104.927 32.563,104.978 30.607,105.054 31.394,105.08 8.819,105.283 23.511,105.346 22.839,105.36 34.061,105.359 20.629,105.41 22.001,105.41 21.341,105.436 33.426,105.461 10.236,105.486 31.801,105.486 30.963,105.512 32.563,105.537 22.788,106.071 23.55,106.071 20.629,106.096 21.341,106.096 22.027,106.096 34.696,106.197 8.996,106.528 23.55,106.731 20.629,106.782 21.341,106.782 22.026,106.782 22.814,106.782 34.214,106.985 2.464,107.391 9.758,107.391 22.788,107.442 23.55,107.442 20.629,107.468 21.341,107.468 22.026,107.468 3.835,107.493 34.747,107.671 28.707,107.975 29.774,107.975 34.239,108.102 27.361,108.534 34.722,108.687 34.265,109.068 28.351,109.22 29.672,109.296 34.722,109.677 3.835,110.871 26.416,110.973 1.3,111.354 26.421,111.709 2.464,113.03 23.525,113.462 28.626,114.148 23.546,114.351 28.499,114.706 23.52,115.316 23.52,116.154 2.438,116.307 18.339,116.332 3.835,116.357 28.067,116.383 30.861,116.434 9.555,116.459 17.602,116.484 5.39,116.561 27.305,116.637 22.911,116.688 26.518,116.764 1.199,117.119 6.761,117.17 8.234,117.805 30.785,117.831 30.124,118.339 27.661,118.593 30.709,118.847 26.599,118.974 28.758,119.228 5.364,119.278 20.828,119.278 17.78,119.329 30.15,119.329 3.835,119.355 7.295,119.431 29.108,119.786 19.964,119.837 30.709,119.863 2.464,119.888 27.559,119.964 9.149,120.015 30.175,120.218 19.863,120.498 28.732,120.65 11.836,120.726 15.397,120.929 30.734,120.955 16.591,121.031 18.847,121.031 26.7,121.056 12.776,121.133 19.634,121.209 14.889,121.285 13.945,121.31 27.889,121.31 30.226,121.361 4.12,121.387 30.734,121.742 10.312,121.768 28.499,122.25 2.438,122.301 16.591,122.301 30.785,122.326 19.334,122.403 27.559,122.403 17.937,122.606 29.439,122.809 28.778,122.885 17.023,123.622 15.296,123.825 23.043,123.901 4.043,123.952 2.438,124.46 22.865,124.612 24.232,124.841 23.647,125.603 22.636,125.628 17.124,125.654 4.018,125.705 2.438,126.848 4.14,127.127 16.967,127.33 18.034,127.33 19.461,127.356 11.506,127.381 11.359,128.118 3.378,128.448 11.455,129.134 14.097,129.134 15.164,129.134 10.185,129.184 13.03,129.184 17.12,129.337 17.983,129.388 18.898,129.388 20.726,129.413 30.582,129.845 22.255,129.87 23.627,130.404 30.556,130.581 12.217,130.759 9.373,130.835 7.087,130.861 22.454,131.013 17.704,131.42 23.754,131.674 30.632,131.775 29.774,131.801 28.224,131.826 25.735,131.851 21.565,131.877 26.751,131.877 17.678,132.74 25.633,132.74 22.555,132.791 14.351,133.528 24.008,133.96 16.612,134.01 13.564,134.061 15.037,134.061 15.9,134.087 26.035,134.341 22.174,134.468 17.069,134.595 21.082,134.671 19.101,134.798
L0: S1.1 S8.1 S15.1 U3.40 | length 125.5
  Top Layer w0.152: v1(15.346,51.74) v1(18.039,51.74)
  Bottom Layer w0.152: v1(15.346,51.74) 8.234,51.74 7.892,52.083 7.892,92.772 7.358,93.306 7.358,107.022 9.172,108.835 16.467,108.835 16.956,108.346 U3.40@18.127,108.346 ; 17.112,21.336 v1(18.572,21.336) ; 17.137,34.011 v1(18.547,34.011) ; v1(18.039,51.74) 18.039,49.759 17.086,48.806 17.086,17.386 18.25,16.223 S15.1@18.25,14.65
  Bottom Layer w0.508: S15.1@18.25,7.15 S15.1@18.25,14.65
L1: S2.1 S9.1 S16.1 U3.41 | length 119.7
  Top Layer w0.152: v1@14.432,43.358 28.859,43.358 29.24,42.977 v1(33.02,42.977)
  Bottom Layer w0.152: v1(5.847,38.583) 10.622,43.358 v1(14.457,43.358) 14.457,50.724 13.949,51.232 8.057,51.232 7.587,51.702 7.587,92.645 7.053,93.179 7.053,107.15 9.047,109.144 16.59,109.144 16.888,108.846 U3.41@18.127,108.846 ; v1(17.683,43.358) 17.683,45.339 18.42,46.076 v1(18.699,46.076) ; v1(33.02,42.977) 33.02,41.707 33.736,40.991 v1(33.736,38.532)
L2: S3.1 S10.1 S17.1 U3.43 | length 87.9
  Top Layer w0.152: v1(6.469,63.856) 7.422,63.856 7.914,63.363 v1(17.343,63.363)
  Bottom Layer w0.152: v1(6.469,61.214) v1(6.469,63.856) 7.282,64.668 7.282,92.518 6.749,93.052 6.749,107.28 8.928,109.46 14.185,109.46 15.15,110.425 18.637,110.425 18.777,110.286 U3.43@18.777,109.996 ; v1(17.343,63.363) 21.474,59.233 31.977,59.233 v1(32.123,59.379)
  other v1: 21.054,59.653
L3: S4.1 S11.1 S18.1 U3.44 | length 97.5
  Top Layer w0.152: v1(6.812,68.199) v1(33.05,68.199)
  Bottom Layer w0.152: v1(6.812,68.199) 6.877,68.264 6.85,92.518 6.444,92.923 6.444,107.431 8.778,109.765 14.038,109.765 15.004,110.73 19.018,110.73 19.277,110.471 U3.44@19.277,109.996 ; v1(19.207,68.199) 19.207,71.399 19.715,71.907 v1(19.715,72.238) ; v1(33.025,80.975) v1(33.05,68.199)
  other v1: 6.863,81.255
L4: S5.1 S12.1 S19.1 U3.46 | length 70.2
  Top Layer w0.152: v1(5.999,90.368) 6.298,90.069 28.327,90.069 v1(28.605,90.348) ; v1@29.323,96.044 30.282,97.003 S19.1@32.822,97.003
  Bottom Layer w0.152: v1(5.999,90.368) 5.999,91.283 5.694,91.588 5.694,107.583 9.058,110.947 13.594,110.947 13.986,111.34 19.729,111.34 20.277,110.792 U3.46@20.277,109.996 ; v1(19.741,87.046) v1@19.741,90.044 ; v1(28.605,90.348) 29.329,91.072 v1(29.329,96.037)
  other v1: 19.766,90.069 5.694,95.707
L5: S6.1 S13.1 S20.1 U3.48 | length 84
  Top Layer w0.152: v1(5.263,92.253) 11.308,92.253 12.324,93.269 14.402,93.269 v1@14.707,92.964 ; v1(12.908,113.233) 13.062,113.233 17.329,117.5 25.811,117.5 26.243,117.932 v1(28.91,117.932)
  Bottom Layer w0.152: v1(5.263,92.253) 5.263,109.677 7.536,111.95 20.261,111.95 21.277,110.935 U3.48@21.277,109.996 ; v1(8.209,112.903) 8.514,112.598 12.298,112.598 v1@12.908,113.208 ; v1@14.707,92.964 14.707,97.206 16.053,98.552 18.39,98.552 v1(19.025,99.187) ; v1@28.885,117.907 29.266,117.907 30.091,117.081 30.091,114.616 30.839,113.868 v1(31.679,113.868)
  other v1: 14.681,92.939 7.447,111.862
L6: S7.1 S14.1 S21.1 U3.49 | length 55.4
  Top Layer w0.152: v1(6.482,121.209) 7.93,121.209 15.6,128.88 28.553,128.88 v1@28.872,128.561
  Bottom Layer w0.152: v1(6.482,125.857) 6.482,118.186 10.012,114.656 14.478,114.656 15.748,113.386 18.547,113.386 v1(18.674,113.513) ; v1(18.953,112.37) 20.299,112.37 21.777,110.892 U3.49@21.777,109.996 ; v1@28.892,128.537 28.88,128.549 28.88,127.152 30.023,126.009 v1(30.505,126.009)
  other v1: 28.88,128.524
LE_SPI_CLK: R9.2 U3.28 | length 71.9
  Top Layer w0.152: v1(11.46,58.826) 12.171,58.826 15.778,55.22 24.44,55.22 v1(24.668,55.448) ; v1(14.021,101.702) 15.342,100.381 v1(15.854,100.381)
  Bottom Layer w0.152: v1(11.46,58.826) 11.092,59.195 11.092,62.903 9.111,64.884 9.111,100.622 9.885,101.397 13.716,101.397 v1(14.021,101.702) ; v1(15.854,100.381) 16.108,100.127 17.251,100.127 18.777,101.652 U3.28@18.777,102.196 ; R9.2@24.668,53.035 v1(24.668,55.448)
LE_SPI_CSS: R11.2 U3.31 | length 72.3
  Top Layer w0.152: v1(11.13,58.242) 12.324,58.242 15.651,54.915 25.583,54.915 v1(25.76,55.093)
  Bottom Layer w0.152: v1(11.13,58.242) 10.787,58.585 10.787,62.777 8.806,64.758 8.806,100.759 9.912,101.865 12.87,101.865 13.302,102.297 15.766,102.297 17.314,103.846 U3.31@18.254,103.846 ; R11.2@25.76,53.035 v1(25.76,55.093)
LE_SPI_MISO: R14.2 U3.39 | length 82.3
  Top Layer w0.152: v1(10.165,57.201) 12.375,57.201 15.27,54.305 v1(27.919,54.305)
  Bottom Layer w0.152: v1(10.165,57.201) 10.165,62.533 8.196,64.502 8.196,92.899 7.663,93.432 7.663,106.895 9.289,108.52 16.224,108.52 16.898,107.846 U3.39@18.127,107.846 ; R14.2@27.919,53.061 v1(27.919,54.305)
LE_SPI_MOSI: R13.2 U3.34 | length 75.3
  Top Layer w0.152: v1(10.724,57.709) 12.4,57.709 15.499,54.61 26.624,54.61 v1(26.827,54.813)
  Bottom Layer w0.152: v1(10.724,57.709) 10.482,57.95 10.482,62.651 8.501,64.632 8.501,100.898 9.787,102.184 12.548,102.184 12.979,102.616 15.651,102.616 17.226,104.191 17.226,105.03 17.542,105.346 U3.34@18.127,105.346 ; R13.2@26.827,53.061 v1(26.827,54.813)
NetANT1_2: C11.1 L4.1 PAD2.1 | length 12.6
  Bottom Layer w0.5: L4.1@31.171,103.175 32.064,103.175 cw(c32.064,103.001) C11.1@32.187,103.124 32.187,95.707 ccw(c35.253,95.707) 33.085,93.539 ccw(c33.78,94.235) 33.78,93.251 PAD2.1@34.767,93.251
NetBAT+_1: BAT+.1 Q2.3 | length 9.1
  Bottom Layer w0.762: BAT+.1@3.979,47 7.97,47 10.004,44.966 Q2.3@12.23,44.966
NetC1_1: C1.1 C2.1 L2.2 U3.8 | length 19.2
  Top Layer w0.508: v2(27.919,115.392) 27.107,114.579 27.107,110.617 25.989,109.499 25.989,105.816 26.268,105.537 v1@27.97,105.537
  Bottom Layer w0.254: U3.8@25.927,105.846 26.899,105.846 27.691,105.054 28.478,105.054 28.656,105.232 28.351,105.537 v1@27.97,105.537
  Bottom Layer w0.508: L2.2@25.43,115.392 25.76,115.722 27.589,115.722 v2(27.919,115.392)
  other v1: 27.843,105.537
NetC3_1: C3.1 C4.1 U3.7 U3.55 | length 8.9
  Bottom Layer w0.254: C3.1@24.77,111.633 24.77,106.731 25.155,106.346 C4.1@28.656,106.346
NetC7_1: C7.1 L1.2 U3.3 | length 4.5
  Bottom Layer w0.254: U3.3@25.927,108.346 26.486,108.346 28.097,109.957 C7.1@28.681,109.957
  Bottom Layer w0.406: C7.1@28.681,109.982 28.758,110.058 L1.2@28.758,111.074
NetC10_1: C10.1 R36.1 R38.1 U1.8 U3.52 | length 19.2
  Bottom Layer w0.254: U1.8@13.894,124.511 13.894,123.317 14.072,123.139 15.519,123.139 16.027,122.631 16.027,119.736 21.285,114.478 21.285,112.398 23.277,110.407 U3.52@23.277,109.996
NetC12_1: C12.1 C13.1 L4.2 U3.10 | length 5.2
  Bottom Layer w0.254: U3.10@25.913,104.851 26.132,104.851 cw(c26.132,103.724) 26.929,104.521 cw(c26.622,104.214) 27.056,104.214 ccw(c28.033,104.214) 27.342,103.524 27.378,103.488 ccw(c28.072,104.181) C13.1@28.072,103.2
  Bottom Layer w0.5: C13.1@28.072,103.2 30.144,103.2 cw(c30.144,103.113) L4.2@30.205,103.175
NetC14_1: C14.1 U3.13 | length 3.7
  Bottom Layer w0.254: U3.13@25.927,103.346 26.275,103.346 26.802,102.819 26.802,101.752 27.234,101.321 C14.1@28.199,101.321
NetC16_1: C16.1 C19.1 L5.1 U2.25 | length 75.7
  Top Layer w0.356: v1(1.422,86.843) 15.677,86.843 16.515,87.681 v1(16.637,87.681)
  Bottom Layer w0.254: U2.25@17.48,80.486 17.48,81.844
  Bottom Layer w0.356: v1(1.422,86.843) 1.422,86.919 0.584,87.757 0.584,98.425 1.905,99.746 1.905,127.94 5.639,131.674 L5.1@10.693,131.674 ; v1(16.637,87.681) 18.364,85.954 C19.1@18.364,83.795 ; 17.48,81.844 17.983,82.347 17.983,82.956 C19.1@18.364,83.337
NetC17_1: C17.1 U3.4 Y1.1 | length 7.4
  Bottom Layer w0.152: U3.4@25.927,107.846 27.306,107.846 28.185,108.725 30.701,108.725 Y1.1@31.018,109.042 ; Y1.1@31.699,109.169 33.038,109.169 C17.1@33.377,109.509
NetC18_1: C18.1 U3.5 Y1.2 | length 9.6
  Bottom Layer w0.152: U3.5@25.927,107.346 27.238,107.346 28.312,108.42 30.572,108.42 30.917,108.076 30.917,106.629 33.006,106.629 C18.1@33.377,106.258
NetC20_1: C20.1 U3.14 Y2.1 | length 8.2
  Bottom Layer w0.254: U3.14@25.927,102.846 26.37,102.402 26.37,97.887 27.488,96.769 C20.1@27.488,95.301
NetC21_1: C21.1 U3.15 Y2.2 | length 5.3
  Bottom Layer w0.254: C21.1@23.703,98.45 25.234,98.45 25.277,98.493 U3.15@25.277,102.196
NetC25_1: C25.1 C36.1 ESD1.1 MIC1.4 | length 76.3
  Top Layer w0.254: v1@2.083,88.29 2.909,88.29 2.972,88.354 v1(15.392,88.354) ; v1(18.339,133.223) MIC1.4@19.177,133.223
  Bottom Layer w0.254: v1(2.062,88.29) 2.062,96.626 2.939,97.503 2.939,127.272 5.93,130.263 15.328,130.263 15.804,130.739 17.938,130.739 18.339,131.14 v1(18.339,133.223) ; v1@15.392,88.392 15.392,85.573 15.697,85.268 C25.1@15.697,84.785
NetC25_2: C25.2 C51.2 U2.22 | length 3.5
  Bottom Layer w0.254: C25.2@15.672,83.82 15.672,81.89 16.13,81.431 U2.22@16.13,80.486
NetC28_1: C28.1 C35.1 ESD3.1 L5.2 MIC1.1 | length 10.4
  Top Layer w0.356: v1(17.005,133.261) 17.932,134.188 20.142,134.188 20.387,133.943 MIC1.1@20.387,133.283
  Bottom Layer w0.356: L5.2@11.659,131.572 12.548,131.572 C28.1@13.437,132.461 ; C28.1@13.538,132.715 ESD3.1@15.869,132.715 ; ESD3.1@15.875,132.721 16.465,132.721 v1(17.005,133.261)
NetC29_1: C29.1 R28.2 S1.2 S2.2 S3.2 S4.2 S5.2 S6.2 S7.2 | length 100.8
  Top Layer w0.152: 5.263,99.39 5.263,110.642 ; 5.288,101.702 v1(8.234,101.702) ; 5.694,57.455 5.694,52.476 6.66,51.511 6.66,40.284 6.837,40.107 ; 8.311,38.001 10.416,38.001 17.266,31.151 17.266,23.684 18.013,22.936
  Bottom Layer w0.152: v1(3.815,95.225) 3.51,94.92 3.51,92.151 4.831,90.83 v1(4.831,84.607) ; v1(5.999,79.273) 5.86,79.134 5.86,62.852 v1(6.025,62.687) ; v1(6.05,115.595) v1(6.05,123.876) ; v1(8.234,101.702) 8.234,107.034 9.416,108.215 12.414,108.215 12.603,108.026 C29.1@12.603,107.671 R28.2@14.178,107.671
NetC30_1: C30.1 R29.2 S8.2 S9.2 S10.2 S11.2 S12.2 S13.2 S14.2 | length 78.6
  Top Layer w0.152: v1(13.391,106.528) 14.61,106.528 ; 16.947,86.436 11.028,86.436 10.825,86.233 10.825,73.254 11.13,72.949 S11.2@17.099,72.949 ; S13.2@17.25,100.001 14.61,102.641 14.61,107.823 17.882,111.095 17.882,111.282 17.607,111.557
  Bottom Layer w0.152: C30.1@12.603,106.528 R29.2@14.178,106.528 ; v1(17.856,98.044) 16.053,98.044 15.062,97.053 15.062,93.32 18.521,89.86 v1(18.521,88.468) ; v1(18.826,36.576) v1(18.826,44.069) ; v1(19.741,49.479) v1(19.741,57.201) ; v1(19.741,62.84) v1(19.741,70.485)
NetC31_2: C31.2 C52.1 U2.21 | length 4.3
  Bottom Layer w0.254: C31.2@14.63,83.82 14.63,81.991 15.48,81.142 U2.21@15.48,79.836
NetC34_2: C34.2 R22.1 U2.1 | length 71.4
  Top Layer w0.152: v1(10.673,68.707) 28.097,68.707 v1(28.148,68.656) ; v1(21.946,81.128) v1(28.148,81.128)
  Bottom Layer w0.152: v1(10.673,68.707) 10.673,70.485 10.355,70.803 10.355,97.985 11.176,98.806 R22.1@12.344,98.806 ; U2.1@19.48,79.836 20.908,79.836 21.285,80.213 C34.2@21.946,80.213 v1(21.946,81.128) ; v1(28.148,68.656) v1(28.148,81.128)
NetC37_1: C37.1 C38.1 U2.20 | length 5.3
  Bottom Layer w0.254: C38.1@12.624,82.753 12.624,81.712 12.827,81.509 13.314,81.509 14.153,80.67 14.153,79.985 14.751,79.386 U2.20@15.48,79.386
NetC39_1: C39.1 R5.2 S15.2 S16.2 S17.2 S18.2 S19.2 S20.2 S21.2 | length 165.2
  Top Layer w0.152: v1(8.082,93.624) 29.393,93.624 31.45,95.682 ; v1(13.391,103.327) 13.111,103.327 12.197,104.242 12.197,111.911 17.479,117.193 25.987,117.193 26.192,117.399 v1(29.113,117.399) ; v1(29.667,120.65) 29.667,121.971 30.637,122.941 30.637,124.079 ; 29.695,93.927 30.231,93.392 30.231,85.065 31.755,83.541 ; v1(29.725,38.001) S16.2@31.247,38.001 ; 33.634,62.484 33.634,79.68
  Bottom Layer w0.152: v1(8.082,93.624) 8.196,93.739 8.196,101.027 9.658,102.489 12.298,102.489 12.603,102.794 C39.1@12.603,103.327 R5.2@14.178,103.327 ; S15.2@21.25,14.65 21.25,15.911 22.687,17.348 22.687,32.791 27.897,38.001 v1(29.725,38.001) ; v1(29.113,117.399) 29.786,116.726 29.786,114.308 v1(30.048,114.046) ; v1(29.667,120.65) 29.667,117.958 30.404,117.221 30.404,114.986 v1(30.556,114.833) ; v1(31.704,39.853) 31.704,40.538 30.967,41.275 30.967,56.921 v1(31.704,57.658)
  Bottom Layer w0.508: S15.2@21.25,7.15 S15.2@21.25,14.895
NetC41_1: C41.1 C42.1 U2.19 | length 3.4
  Bottom Layer w0.254: C41.1@13.347,78.936 U2.19@15.48,78.936 ; C41.1@13.391,78.98 C42.1@13.391,80.264
NetC45_1: C45.1 R24.1 U2.5 | length 57.7
  Top Layer w0.152: v1@9.835,69.672 22.789,69.672 v1(22.916,69.799)
  Bottom Layer w0.152: v1(9.835,69.698) 9.746,69.787 9.746,99.045 10.802,100.101 13.894,100.101 R24.1@14.122,100.33 ; U2.5@19.48,78.036 20.495,78.036 C45.1@21.95,76.581 21.95,75.792 22.916,74.827 v1@22.916,69.825
NetC46_1: C46.1 R25.1 U2.7 | length 51.8
  Top Layer w0.152: v1(9.835,69.037) 10.012,69.215 v1(20.757,69.215)
  Bottom Layer w0.152: v1(9.835,69.037) 9.416,69.456 9.416,99.56 R25.1@10.566,100.711 ; U2.7@19.48,77.136 19.48,74.86 C46.1@19.791,74.549 19.791,73.406 20.757,72.441 v1(20.757,69.215)
NetC47_1: C47.1 R26.1 U2.8 | length 3.2
  Bottom Layer w0.152: R26.1@18.598,73.406 C47.1@18.598,74.549 18.83,74.781 U2.8@18.83,76.486
NetC50_1: C50.1 R38.2 R39.1 U5.7 U5.8 | length 16
  Top Layer w0.254: v1(16.358,118.618) 16.358,119.61 18.464,121.717 v1(21.361,121.717)
  Bottom Layer w0.254: v1(16.358,118.618) 17.043,117.932 R38.2@17.043,117.602 ; v1(21.361,121.717) 23.419,121.717 23.927,122.225 25.349,122.225 25.654,122.53 25.654,124.454 U5.7@26.924,124.454